# Altium PCB PCB_OSHW_BiDi_SDI_Fiber_Converter_V4_Reclocker_2024-11-17.pcbdoc
Units mm, origin at the board's own origin, x right, y up, seen from the top; angles counter-clockwise.
Board outline 127.84 x 68.58 mm, 2 copper layers (Top Layer, Bottom Layer); 119 components, 62 nets, 274 pads, 133 vias.
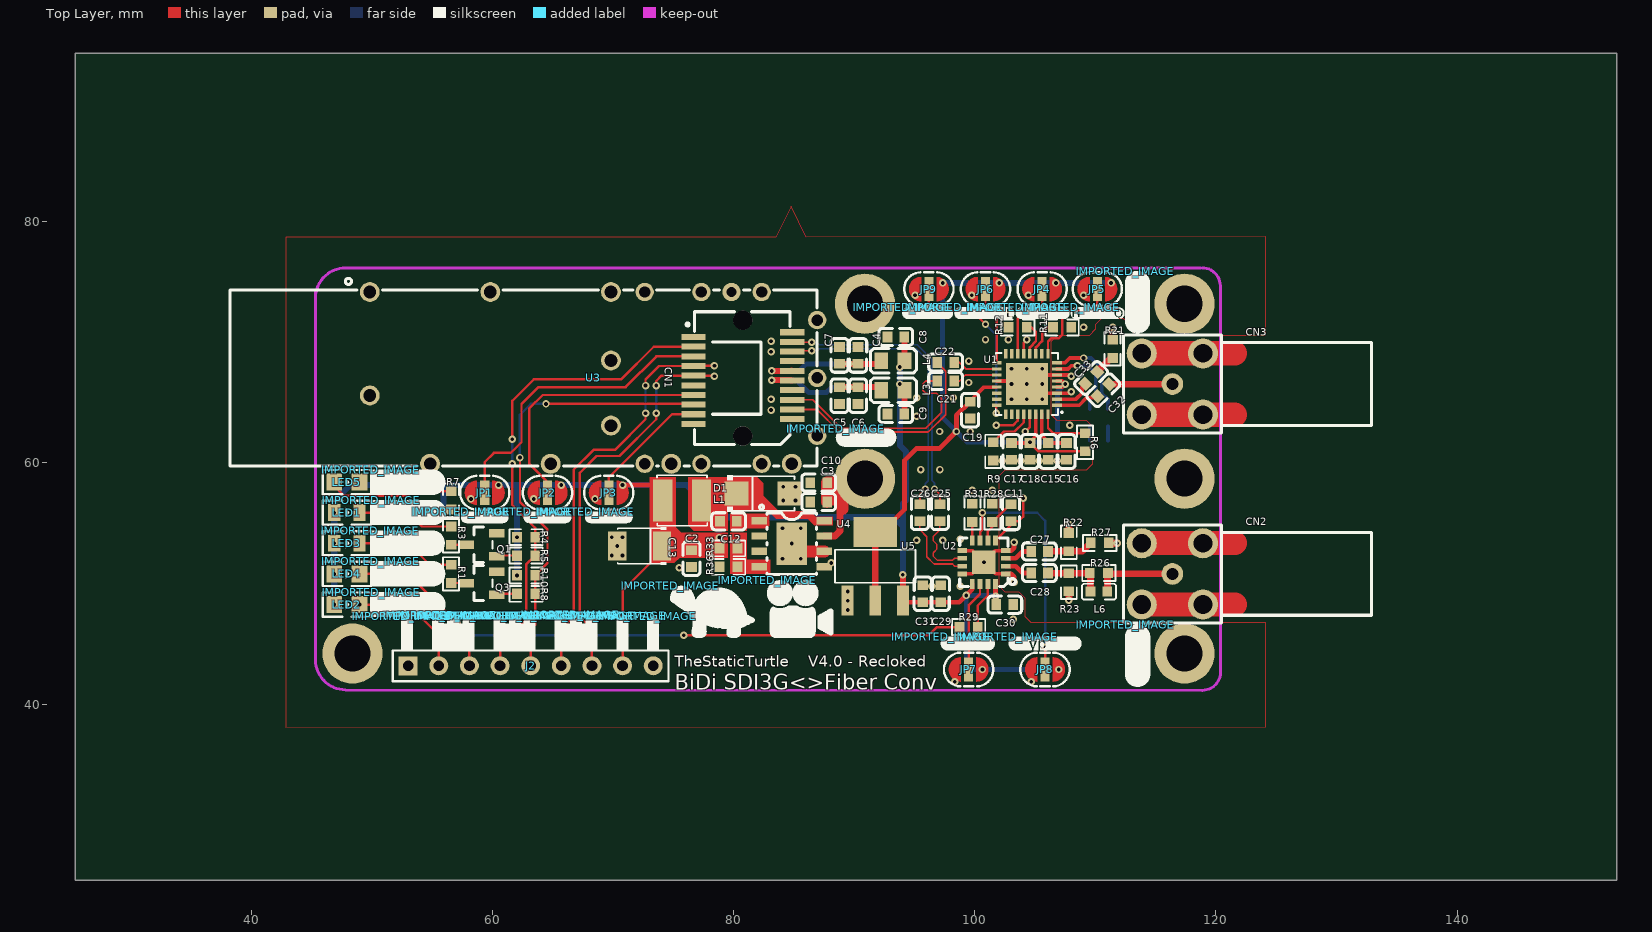
[diagram p0: Top Layer view]
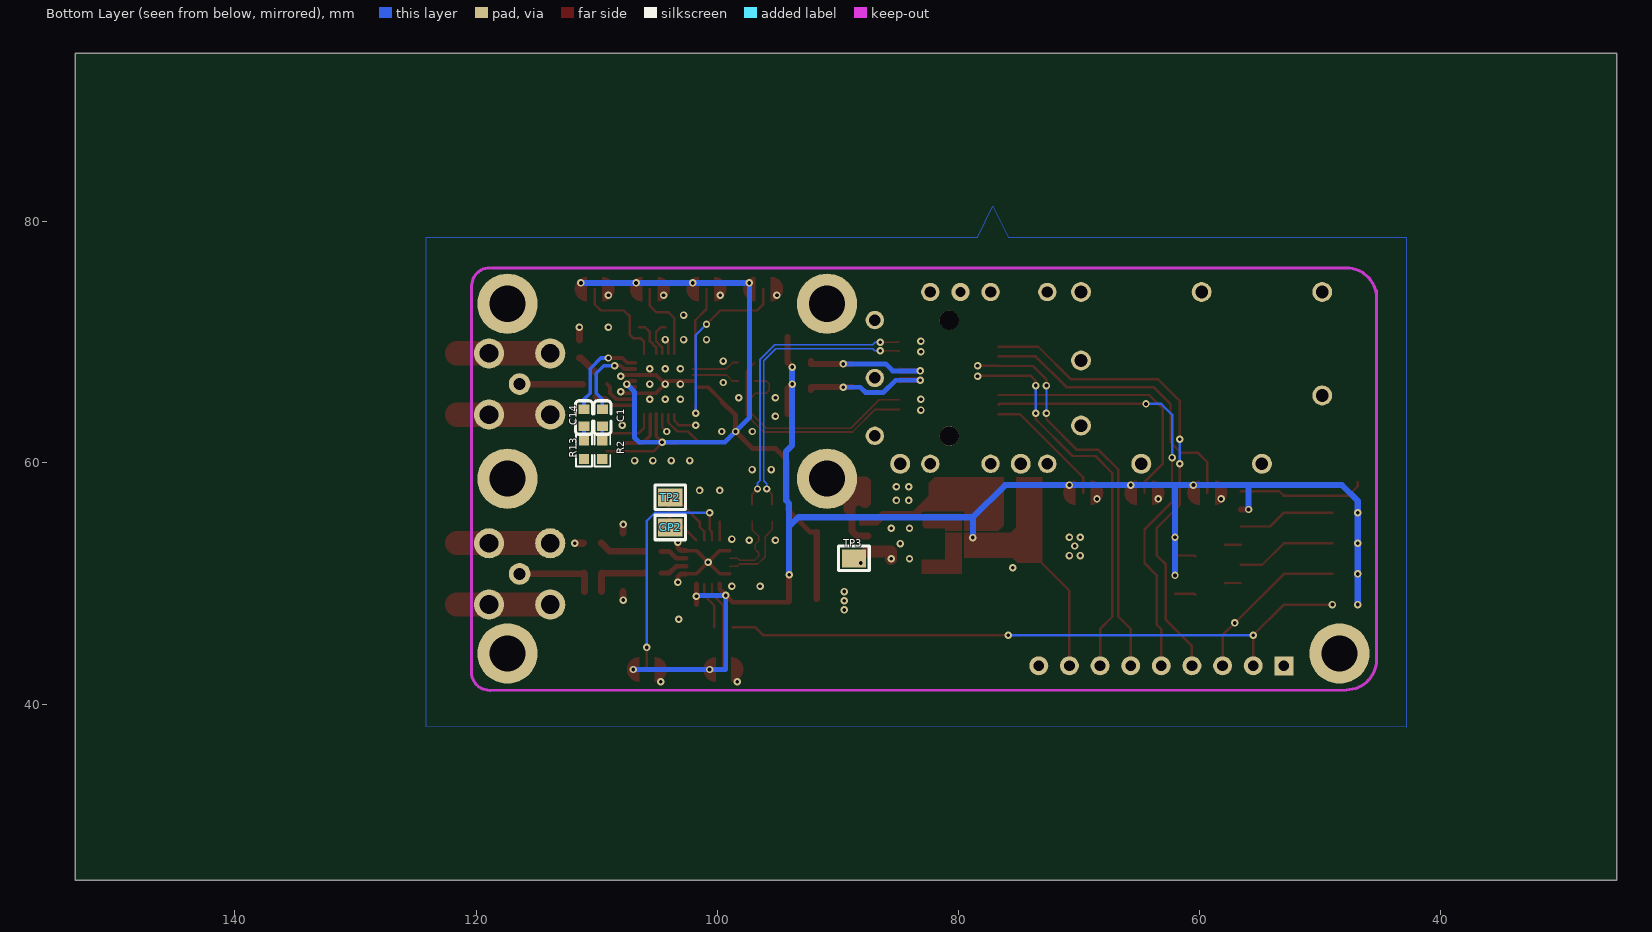
[diagram p1: Bottom Layer view, seen from below]

## Layer stack, top to bottom
Top Layer: signal copper (thickness not stored)
Dielectric: dielectric 0.32, FR-4, Dk 4.8
Bottom Layer: signal copper (thickness not stored)

## Board outline
153.239,25.4 25.4,25.4 25.4,93.98 153.239,93.98

## Components (designator, comment, footprint, x,y, rotation, side; value= is the part's Value field where it differs from the comment)
C1 "4.7uF" C0603#1 109.525,63.754 r90 bottom
C2 "100n" C0603#2 76.505,52.07 r90 top
C3 "100n" C0603#2 87.062,56.764 r0 top
C4 "10u" C0603#2 90.323,68.917 r270 top
C5 "100n" C0603#2 88.787,65.589 r90 top
C6 "10u" C0603#2 90.323,65.589 r90 top
C7 "100n" C0603#2 88.787,68.917 r270 top
C8 "100n" C0603#2 93.459,70.454 r0 top
C9 "10u" C0603#2 93.459,64.053 r0 top
C10 "10u" C0603#2 87.062,58.364 r0 top
C11 "DNF" C0603#2 103,55.868 r90 top
C12 "10n" C0603#2 79.573,55.163 r180 top
C13 "100uF" CASE-B_3528 72.212,53.115 r180 top
C14 "4.7uF" C0603#1 111.049,63.754 r90 bottom
C15 "1u" C0603#2 106.096,60.96 r90 top
C16 "100n" C0603#2 107.62,60.96 r90 top
C17 "100n" C0603#2 103.048,60.96 r90 top
C18 "1u" C0603#2 104.572,60.96 r90 top
C19 "100n" C0603#2 99.619,64.389 r90 top
C21 "4.7uF" C0603#2 97.587,66.802 r0 top
C22 "4.7uF" C0603#2 97.587,68.326 r0 top
C25 "4.7u" C0603#2 97.111,55.868 r270 top
C26 "4.7u" C0603#2 95.447,55.868 r270 top
C27 "1u" C0603#2 105.369,52.667 r0 top
C28 "1u" C0603#2 105.369,50.874 r0 top
C29 "10n" C0603#2 97.175,49.147 r270 top
C30 "10n" C0603#2 102.488,48.251 r180 top
C31 "10u" C0603#2 95.682,49.149 r270 top
C32 "4.7uF" C0603#2 110.668,66.04 r45 top
C33 "4.7uF" C0603#2 109.652,67.056 r45 top
CN1 "HC-SFP-20P" CONN-SMD_20P-P0.80_HCTL_HC-SFP-20P 80.761,67.042 r270 top
CN2 "SDI_IN" AMPHENOLRF_034-1030-12G 116.383,50.8 r0 top
CN3 "SDI_OUT" AMPHENOLRF_034-1030-12G 116.383,66.548 r0 top
D1 "SS34" SMA_L4.3-W2.6-LS5.2-RD 82.453,57.468 r0 top
GP2 "TEST-POINT-PTH-1X1" TESTPOINT-SMD_L1.6-W0.8_RCU-0C 103.896,54.651 r0 bottom
IMPORTED_IMAGE "IMPORTED_IMAGE" IMPORTED_IMAGE 49.913,59.436 r0 top
IMPORTED_IMAGE "IMPORTED_IMAGE" IMPORTED_IMAGE 49.958,56.928 r0 top
IMPORTED_IMAGE "IMPORTED_IMAGE" IMPORTED_IMAGE 49.866,54.388 r0 top
IMPORTED_IMAGE "IMPORTED_IMAGE" IMPORTED_IMAGE 49.906,51.848 r0 top
IMPORTED_IMAGE "IMPORTED_IMAGE" IMPORTED_IMAGE 49.93,49.292 r0 top
IMPORTED_IMAGE "IMPORTED_IMAGE" IMPORTED_IMAGE 103.397,72.898 r0 top
IMPORTED_IMAGE "IMPORTED_IMAGE" IMPORTED_IMAGE 107.969,72.898 r0 top
IMPORTED_IMAGE "IMPORTED_IMAGE" IMPORTED_IMAGE 98.317,72.898 r0 top
IMPORTED_IMAGE "IMPORTED_IMAGE" IMPORTED_IMAGE 93.999,72.898 r0 top
IMPORTED_IMAGE "IMPORTED_IMAGE" IMPORTED_IMAGE 57.391,55.976 r0 top
IMPORTED_IMAGE "IMPORTED_IMAGE" IMPORTED_IMAGE 62.598,55.976 r0 top
IMPORTED_IMAGE "IMPORTED_IMAGE" IMPORTED_IMAGE 67.678,55.976 r0 top
IMPORTED_IMAGE "IMPORTED_IMAGE" IMPORTED_IMAGE 112.465,75.914 r0 top
IMPORTED_IMAGE "IMPORTED_IMAGE" IMPORTED_IMAGE 112.473,46.595 r0 top
IMPORTED_IMAGE "IMPORTED_IMAGE" IMPORTED_IMAGE 102.818,45.593 r0 top
IMPORTED_IMAGE "IMPORTED_IMAGE" IMPORTED_IMAGE 97.188,45.593 r0 top
IMPORTED_IMAGE "IMPORTED_IMAGE" IMPORTED_IMAGE 52.435,47.308 r0 top
IMPORTED_IMAGE "IMPORTED_IMAGE" IMPORTED_IMAGE 54.995,47.348 r0 top
IMPORTED_IMAGE "IMPORTED_IMAGE" IMPORTED_IMAGE 56.247,47.372 r0 top
IMPORTED_IMAGE "IMPORTED_IMAGE" IMPORTED_IMAGE 57.556,47.348 r0 top
IMPORTED_IMAGE "IMPORTED_IMAGE" IMPORTED_IMAGE 61.396,47.348 r0 top
IMPORTED_IMAGE "IMPORTED_IMAGE" IMPORTED_IMAGE 62.612,47.334 r0 top
IMPORTED_IMAGE "IMPORTED_IMAGE" IMPORTED_IMAGE 60.116,47.342 r0 top
IMPORTED_IMAGE "IMPORTED_IMAGE" IMPORTED_IMAGE 65.173,47.348 r0 top
IMPORTED_IMAGE "IMPORTED_IMAGE" IMPORTED_IMAGE 66.453,47.398 r0 top
IMPORTED_IMAGE "IMPORTED_IMAGE" IMPORTED_IMAGE 67.733,47.348 r0 top
IMPORTED_IMAGE "IMPORTED_IMAGE" IMPORTED_IMAGE 70.293,47.348 r0 top
IMPORTED_IMAGE "IMPORTED_IMAGE" IMPORTED_IMAGE 72.854,47.308 r0 top
IMPORTED_IMAGE "IMPORTED_IMAGE" IMPORTED_IMAGE 74.732,49.807 r0 top
IMPORTED_IMAGE "IMPORTED_IMAGE" IMPORTED_IMAGE 82.772,50.269 r0 top
IMPORTED_IMAGE "IMPORTED_IMAGE" IMPORTED_IMAGE 88.49,62.842 r0 top
J2 "HDR-M-2.54_1x9" HDR-M-2.54_1X9 63.17,43.18 r0 top
JP1 "SOLDER BRIDGE 3P" "SOLDER BRIDGE 3P" 59.36,57.531 r270 top
JP2 "SOLDER BRIDGE 3P" "SOLDER BRIDGE 3P" 64.567,57.531 r270 top
JP3 "SOLDER BRIDGE 3P" "SOLDER BRIDGE 3P" 69.647,57.531 r270 top
JP4 "SOLDER BRIDGE 3P" "SOLDER BRIDGE 3P" 105.588,74.422 r270 top
JP5 "SOLDER BRIDGE 3P" "SOLDER BRIDGE 3P" 110.16,74.422 r270 top
JP6 "SOLDER BRIDGE 3P" "SOLDER BRIDGE 3P" 100.889,74.422 r270 top
JP7 "SOLDER BRIDGE 3P" "SOLDER BRIDGE 3P" 99.489,42.874 r270 top
JP8 "SOLDER BRIDGE 3P" "SOLDER BRIDGE 3P" 105.825,42.874 r270 top
JP9 "SOLDER BRIDGE 3P" "SOLDER BRIDGE 3P" 96.19,74.422 r270 top
L1 "10uH" IND-SMD_L4.0-W4.0 75.732,56.892 r180 top
L3 "100Ω" L0805 93.203,66.037 r180 top
L4 "100Ω" L0805 93.203,68.469 r180 top
L6 "2.7n" L0603 110.297,49.34 r180 top
LED1 "LED_SFP_FAULT" LED0805_RED 47.93,55.88 r0 top
LED2 "LED_CD" LED0805_GREEN 47.93,48.26 r0 top
LED3 "LED_SFP_LOS" LED0805_RED 47.93,53.34 r0 top
LED4 "LED_LOCK" LED0805_GREEN 47.93,50.8 r0 top
LED5 "LED_POWER" LED0805_BLUE 47.93,58.42 r0 top
Q1 "2N3904(SOT-23)" SOT-23-3_L2.9-W1.3-P1.90-LS2.4-TR 59.106,53.213 r0 top
Q3 "2N3904(SOT-23)" SOT-23-3_L2.9-W1.3-P1.90-LS2.4-TR 59.106,50.038 r0 top
R1 "300" R0603#1 56.566,50.8 r270 top
R2 "75" R0603#2 109.525,61.087 r90 bottom
R3 "300" R0603#1 56.566,53.975 r270 top
R4 "10k" R0603#1 62.789,53.848 r0 top
R5 "1k" R0603#1 62.789,52.324 r0 top
R6 "10k" R0603#1 109.144,61.722 r90 top
R7 "300" R0603#1 56.566,56.896 r270 top
R8 "1k" R0603#1 62.789,49.149 r0 top
R9 "1k" R0603#1 101.524,60.96 r270 top
R10 "10k" R0603#1 62.789,50.673 r0 top
R11 "1k" R0603#1 107.239,71.247 r180 top
R12 "1k" R0603#1 103.556,71.247 r0 top
R13 "75" R0603#2 111.049,61.087 r90 bottom
R21 "75" R0603#1 111.43,69.469 r90 top
R22 "75" R0603#1 107.8,53.434 r270 top
R23 "75" R0603#1 107.8,50.107 r90 top
R26 "75" R0603#1 110.297,50.874 r0 top
R27 "75" R0603#1 110.361,53.371 r0 top
R28 "1k" R0603#1 101.464,55.868 r270 top
R29 "DNF" R0603#1 99.488,46.393 r180 top
R31 "DNF" R0603#1 99.799,55.868 r90 top
R33 "10k" R0603#1 79.573,52.923 r0 top
R36 "5.6k" R0603#1 79.573,51.387 r180 top
TP2 "TEST-POINT-PTH-1X1" TESTPOINT-SMD_L1.6-W0.8_RCU-0C 103.896,57.148 r0 bottom
TP3 "TEST-POINT-PTH-1X1" TESTPOINT-SMD_L1.6-W0.8_RCU-0C 88.662,52.091 r0 bottom
U1 "LMH0397RTVR" QFN-32_L5.0-W5.0-P0.50-TL-EP3.5-1 104.318,66.548 r180 top
U2 "EQCO30R5" QFN16G-0.65-4X4MM 100.76,51.771 r180 top
U3 "HC-SFP-01L" TH_HC-SFP-01L 68.377,67.056 r0 top
U4 "TPS5430DDAR" ESOP-8_L4.9-W3.9-P1.27-LS6.0-TL-EP 84.822,53.307 r0 top
U5 "AMS1117-2.5(SOT-223)" SOT-223-4_L6.5-W3.5-P2.30-LS7.0-BR 91.745,51.435 r270 top
? "" ? 129.115,62.588 r0 top
? "" ? 129.132,54.809 r0 top

## Footprints (in the part's own frame and the unit in brackets; to place one, negate y for a bottom-side part, rotate by r counter-clockwise, add the part's x,y. Pads: shape width x height; smd on the part's side, far side on the other; paste and mask are expansions set on the pad)
AMPHENOLRF_034-1030-12G [mm]
  round 1.8 hole 1 paste+0 mask+0.051: 1(0,0)
  round 2.5 hole 1.55 paste+0 mask+0.051: GND(-2.54,-2.54) GND(-2.54,2.54) GND(2.54,-2.54) GND(2.54,2.54)
  silkscreen extent -4.06,-4.06 16.51,4.06
C0603#1 [mm]
  rect 0.8x0.9 smd paste+0 mask+0.051: 1(0.7,0) 2(-0.7,0)
  silkscreen extent -1.39,-0.72 1.41,0.71
C0603#2 [mm]
  rect 0.8x0.9 smd paste+0 mask+0.051: 1(-0.7,0) 2(0.7,0)
  silkscreen extent -1.41,-0.71 1.39,0.72
CASE-B_3528 [mm]
  rect 1.506x2.376 smd paste+0 mask+0.051: 1(-1.861,0) 2(1.861,0)
  silkscreen extent -2.21,-1.55 1.83,1.55
CONN-SMD_20P-P0.80_HCTL_HC-SFP-20P [mm]
  rect 0.5x2 smd paste+0 mask+0.051: 1(-3.4,-4.1) 2(-2.6,-4.1) 3(-1.8,-4.1) 4(-1,-4.1) 5(-0.2,-4.1) 6(0.6,-4.1) 7(1.4,-4.1) 8(2.2,-4.1) 9(3,-4.1) 10(3.8,-4.1) 11(3.4,4.1) 12(2.6,4.1) 13(1.8,4.1) 14(1,4.1) 15(0.2,4.1) 16(-0.6,4.1) 17(-1.4,4.1) 18(-2.2,4.1) 19(-3,4.1) 20(-3.8,4.1)
  round 1.6 hole 1.6 unplated paste+0: ""(-4.8,0) ""(4.8,0)
  silkscreen extent -5.5,-4.7 5.5,3.9
ESOP-8_L4.9-W3.9-P1.27-LS6.0-TL-EP [mm]
  rect 1.3x0.6 smd paste+0 mask+0.051: 1(-2.7,1.905) 2(-2.7,0.635) 3(-2.7,-0.635) 4(-2.7,-1.905) 5(2.7,-1.905) 6(2.7,-0.635) 7(2.7,0.635) 8(2.7,1.905)
  rect 2.5x3.5 smd paste+0 mask+0.051: 9(0,0)
  silkscreen extent -2.67,-2.55 2.05,3.2
HDR-M-2.54_1X9 [mil]
  rect 62x62 hole 35 paste+0 mask+2: 1(-400,0)
  round 62 hole 35 paste+0 mask+2: 2(-300,0) 3(-200,0) 4(-100,0) 5(0,0) 6(100,0) 7(200,0) 8(300,0) 9(400,0)
  silkscreen extent -450,-50 450,50
IMPORTED_IMAGE [mm]
  silkscreen extent 0,-2.06 6.16,0
IND-SMD_L4.0-W4.0 [mm]
  rect 1.6x3.5 smd paste+0 mask+0.051: 1(-1.6,0) 2(1.6,0)
  silkscreen extent -2.08,-2.1 2.08,2.1
L0603 [mm]
  rect 0.8x0.864 smd paste-100 mask+0.051: 1(-0.7,0) 2(0.7,0)
  silkscreen extent -1.42,-0.65 1.41,0.67
L0805 [mm]
  rect 1.133x1.377 smd paste-100 mask+0.051: 1(-0.966,0) 2(0.966,0)
  silkscreen extent -1.95,-1.02 1.86,1.02
LED0805_BLUE [mm]
  rect 1.3x1.4 smd paste+0 mask+0.051: 1(-1.05,0) 2(1.05,0)
  silkscreen extent -2,-1 2.3,1
LED0805_GREEN [mm]
  rect 1.3x1.4 smd paste+0 mask+0.051: 1(-1.05,0) 2(1.05,0)
  silkscreen extent -2,-1 2.3,1
LED0805_RED [mm]
  rect 1x1.4 smd paste+0 mask+0.051: 1(-1.05,0) 2(1.05,0)
  silkscreen extent -2,-1 2.3,1
QFN16G-0.65-4X4MM [mil]
  rect 31.5x15.7 smd paste+0 mask+2: 1(-71,38) 2(-71,13) 3(-71,-13) 4(-71,-38) 9(71,-38) 10(71,-13) 11(71,13) 12(71,38)
  rect 15.7x31.5 smd paste+0 mask+2: 5(-38,-71) 6(-13,-71) 7(13,-71) 8(38,-71) 13(38,71) 14(13,71) 15(-13,71) 16(-38,71)
  rect 76.8x76.8 smd paste+0 mask+2: 17(0,0)
  silkscreen extent -103,-79 79,79
QFN-32_L5.0-W5.0-P0.50-TL-EP3.5-1 [mm]
  rect 0.8x0.28 smd paste-100 mask+0.051: 1(-2.5,1.75) 2(-2.5,1.25) 3(-2.5,0.75) 4(-2.5,0.25) 5(-2.5,-0.25) 6(-2.5,-0.75) 7(-2.5,-1.25) 8(-2.5,-1.75) 17(2.5,-1.75) 18(2.5,-1.25) 19(2.5,-0.75) 20(2.5,-0.25) 21(2.5,0.25) 22(2.5,0.75) 23(2.5,1.25) 24(2.5,1.75)
  rect 0.28x0.8 smd paste-100 mask+0.051: 9(-1.75,-2.5) 10(-1.25,-2.5) 11(-0.75,-2.5) 12(-0.25,-2.5) 13(0.25,-2.5) 14(0.75,-2.5) 15(1.25,-2.5) 16(1.75,-2.5) 25(1.75,2.5) 26(1.25,2.5) 27(0.75,2.5) 28(0.25,2.5) 29(-0.25,2.5) 30(-0.75,2.5) 31(-1.25,2.5) 32(-1.75,2.5)
  rect 3.5x3.5 smd paste-100 mask+0.051: 33(0,0)
  silkscreen extent -2.99,-2.58 2.58,2.58
R0603#1 [mm]
  rect 0.806x0.864 smd paste-100 mask+0.051: 1(-0.753,0) 2(0.753,0)
  silkscreen extent -1.39,-0.66 1.39,0.66
R0603#2 [mm]
  rect 0.806x0.864 smd paste-100 mask+0.051: 1(0.753,0) 2(-0.753,0)
  silkscreen extent -1.39,-0.66 1.39,0.66
SMA_L4.3-W2.6-LS5.2-RD [mm]
  rect 2x2 smd paste+0 mask+0.051: 1(-2.2,0) 2(2.2,0)
  silkscreen extent -2.98,-1.5 2.6,1.5
"SOLDER BRIDGE 3P" [mm]
  rect 2x0.75 smd paste+0 mask+0.051: 2(0,0)
  Top Layer region: 1,-0.643 0.999,-0.689 0.996,-0.735 0.99,-0.781 0.983,-0.827 0.973,-0.872 0.962,-0.917 0.948,-0.961 0.932,-1.004 0.915,-1.047 0.895,-1.089 0.874,-1.13 0.85,-1.169 0.825,-1.208 0.798,-1.246 0.769,-1.282 0.739,-1.317 0.707,-1.35 0.674,-1.382 0.639,-1.412 0.603,-1.441 0.565,-1.468 0.526,-1.493 0.487,-1.517 0.446,-1.538 0.404,-1.558 0.361,-1.575 0.318,-1.591 0.274,-1.605 0.229,-1.616 0.184,-1.626 0.138,-1.633 0.092,-1.639 0.046,-1.642 0,-1.643 -0.046,-1.642 -0.092,-1.639 -0.138,-1.633 -0.184,-1.626 -0.229,-1.616 -0.274,-1.605 -0.318,-1.591 -0.361,-1.575 -0.404,-1.558 -0.446,-1.538 -0.487,-1.517 -0.526,-1.493 -0.565,-1.468 -0.603,-1.441 -0.639,-1.412 -0.674,-1.382 -0.707,-1.35 -0.739,-1.317 -0.769,-1.282 -0.798,-1.246 -0.825,-1.208 -0.85,-1.169 -0.874,-1.13 -0.895,-1.089 -0.915,-1.047 -0.932,-1.004 -0.948,-0.961 -0.962,-0.917 -0.973,-0.872 -0.983,-0.827 -0.99,-0.781 -0.996,-0.735 -0.999,-0.689 -1,-0.643
  Top Layer region: 1,0.643 0.999,0.689 0.996,0.735 0.99,0.781 0.983,0.827 0.973,0.872 0.962,0.917 0.948,0.961 0.932,1.004 0.915,1.047 0.895,1.089 0.874,1.13 0.85,1.169 0.825,1.208 0.798,1.246 0.769,1.282 0.739,1.317 0.707,1.35 0.674,1.382 0.639,1.412 0.603,1.441 0.565,1.468 0.526,1.493 0.487,1.517 0.446,1.538 0.404,1.558 0.361,1.575 0.318,1.591 0.274,1.605 0.229,1.616 0.184,1.626 0.138,1.633 0.092,1.639 0.046,1.642 0,1.643 -0.046,1.642 -0.092,1.639 -0.138,1.633 -0.184,1.626 -0.229,1.616 -0.274,1.605 -0.318,1.591 -0.361,1.575 -0.404,1.558 -0.446,1.538 -0.487,1.517 -0.526,1.493 -0.565,1.468 -0.603,1.441 -0.639,1.412 -0.674,1.382 -0.707,1.35 -0.739,1.317 -0.769,1.282 -0.798,1.246 -0.825,1.208 -0.85,1.169 -0.874,1.13 -0.895,1.089 -0.915,1.047 -0.932,1.004 -0.948,0.961 -0.962,0.917 -0.973,0.872 -0.983,0.827 -0.99,0.781 -0.996,0.735 -0.999,0.689 -1,0.643
  silkscreen extent -1.4,-2.04 1.4,2.04
SOT-23-3_L2.9-W1.3-P1.90-LS2.4-TR [mm]
  rect 1.25x0.7 smd paste+0 mask+0.051: 1(1.25,0.95) 2(1.25,-0.95) 3(-1.25,0)
  silkscreen extent -0.65,-1.46 0.9,1.46
SOT-223-4_L6.5-W3.5-P2.30-LS7.0-BR [mm]
  rect 2.47x0.98 smd paste+0 mask+0.051: 1(2.835,-2.3) 2(2.835,0) 3(2.835,2.3)
  rect 2.47x3.6 smd paste+0 mask+0.051: 4(-2.835,0)
  silkscreen extent -1.37,-3.33 1.37,3.33
TESTPOINT-SMD_L1.6-W0.8_RCU-0C [mm]
  rect 2x1.5 smd paste+0 mask+0.05: 1(0,0)
  silkscreen extent -1.27,-1.02 1.27,1.02
TH_HC-SFP-01L [mm]
  round 1.65 hole 1.05 paste+0 mask+0.05: 1(-18.55,7.125) 2(-8.55,7.125) 3(1.45,7.125) 11(16.45,-7.125) 14(6.45,-7.125) 16(-3.55,-7.125) 17(-13.55,-7.125) 18(-18.55,-1.455) 19(1.45,-3.955) 20(1.45,1.445)
  round 1.524 hole 0.95 paste+0 mask+0.05: 4(4.25,7.125) 5(8.95,7.125) 7(13.95,7.125) 8(18.55,4.795) 9(18.55,-0.005) 10(18.55,-4.805) 12(13.95,-7.125) 13(8.95,-7.125) 15(4.25,-7.125)
  round 1.524 hole 0.85 paste+0 mask+0.05: 6(11.45,7.125)
  Keep-Out Layer lines w0.254: -23.05,-7.239 -23.05,7.239
  silkscreen extent -30.15,-7.3 18.55,8.25
? [mm]

## Free pads (board coordinates)
  round 5 hole 3 paste+0 mask+0.051: 1(48.39,44.2) 1(90.89,73.2) 1(90.89,58.7) 1(117.39,44.2) 1(117.39,58.7) 1(117.39,73.2)

## Via types
v1: diameter 0.62, hole 0.31, Top Layer to Bottom Layer, tented both sides, 129 vias
v2: diameter 0.6, hole 0.3, Top Layer to Bottom Layer, tented both sides, 4 vias

## Nets (pads, with @x,y where several pads share a name; then routed paths per layer and width w, separated by ;. In a path a pad name is that pad's centre, name@x,y a point inside that pad or via, vN(x,y) a via of type N, cw(c..) or ccw(c..) an arc to the next point about the centre after c; other vN are vias at no path point)
+1.8V: C15.2 C16.2 U1.31 | length 4.1
  Top Layer w0.3: U1.31 105.568,62.25 106.157,61.661 C16.2
+2.5V: C17.2 C18.2 C19.2 R6.1 U1.4 U1.5 U1.21 U1.30 U5.2 U5.4 | length 74.4
  Top Layer w0.2: C18.2@104.572,61.671 105.272,60.96 R6.1@109.144,60.96
  Top Layer w0.3: C19.2 99.619,65.151 100.762,66.294 U1.21@101.778,66.294 ; C17.2@103.302,61.661 104.511,61.661 105.067,62.217 U1.30@105.067,64.059 ; U1.4 107.243,66.298 v1(107.493,66.548) 107.243,66.798 U1.5
  Top Layer w0.4: U5.4 92.294,54.27 94.158,56.134 94.158,60.198 95.174,61.214 97.079,61.214 v1(98.476,62.611) 98.476,63.947 C19.2
  Top Layer w0.5: U5.2@91.745,48.727 U5.4
  Bottom Layer w0.4: v1(97.333,74.93) 97.333,63.754 99.365,61.722 v1(104.572,61.722) 106.477,61.722 106.858,62.103 106.858,65.913 v1(107.493,66.548)
  Bottom Layer w0.5: v1(97.333,74.93) v1(111.303,74.93)
  other v1: 102.032,74.93 106.731,74.93
+3.3V: C2.2 C8.2 C9.2 C13.1 C29.2 C30.2 C31.2 J2.8 L1.2 L3.1 L4.1 LED1.1 LED2.1 LED3.1 LED4.1 R4.1 R7.2 R10.1 R33.1 U2.13 U2.16 U5.3 | length 144.8
  Top Layer w0.2: J2.8 70.79,49.403 74.072,52.685 C13.1@74.072,53.114
  Top Layer w0.4: v1(70.79,58.166) 73.457,58.166 74.133,57.49 L1.2 ; U5.3 94.045,48.448 C31.2 ; C31.2 98.718,48.449 v1(99.287,49.019) 99.794,49.526 U2.13 ; v1(101.72,48.955) 101.72,48.251 U2.16
  Top Layer w0.5: v1(55.931,56.143) R7.2 ; v1(93.779,66.549) 94.159,66.169 C9.2@94.159,64.053 ; v1(93.779,67.957) 94.163,68.341 C8.2@94.159,70.454 ; v1(94.031,50.736) 94.045,50.722 U5.3
  Bottom Layer w0.4: v1@99.286,49.019 99.286,42.873 v1@100.633,42.873 ; v1(99.287,49.019) 101.656,49.019 v1(101.72,48.955) ; v1@100.632,42.874 105.039,42.874 v1@106.968,42.874
  Bottom Layer w0.5: v1@46.879,55.88 46.879,56.86 48.184,58.166 55.931,58.166 ; v1(46.88,48.26) v1(46.88,50.8) v1(46.88,55.88) ; v1@62.035,53.848 62.035,58.166 v1(60.503,58.166) ; v1(62.036,50.673) v1(62.036,53.848) ; v1@78.791,53.812 78.791,55.499 76.124,58.166 v1(70.79,58.166) v1(60.503,58.166) ; v1(78.801,53.811) 78.801,55.499 93.269,55.499 94.031,54.737 v1(94.031,50.736) 94.031,56.642 94.285,56.896 94.285,60.96 93.779,61.466 v1(93.779,66.549) v1(93.779,67.957) ; 55.931,58.166 v1(55.931,56.143) 55.931,58.166 ; 55.931,58.166 v1(60.503,58.166)
  other v1: 100.632,42.874 106.968,42.874 46.88,53.34 65.71,58.166
+5V: C3.2 C10.2 pad.1@90.89,58.7 U4.7 | length 14.3
  Top Layer w0.6: U4.7 88.41,53.942 88.824,54.356 88.824,56.411 88.471,56.764 C3.2
  Top Layer w1: pad.1@88.858,58.7 pad.1@89.047,58.511 ; pad.1@89.047,58.511 89.047,56.188 89.047,57.658 88.341,58.364 C10.2 C3.2 89.047,58.049 pad.1@89.047,58.511
DRIVER_I2C_ADDR0: R11.2 U1.11 | length 3.1
  Top Layer w0.2: U1.11 105.067,69.583 105.588,70.104 105.588,70.866 105.969,71.247 R11.2@106.485,71.247
DRIVER_I2C_ADDR1: R9.1 U1.28 | length 3.9
  Top Layer w0.2: R9.1 102.421,62.611 103.302,62.611 104.069,63.378 U1.28
DRIVER_LOCK_N: J2.3 LED4.2 U1.27 | length 72.4
  Top Layer w0.2: LED4.2 53.01,50.8 v1(57.074,46.736) 58.09,45.72 J2.3 ; v1(101.778,63.119) 103.175,63.119 103.568,63.512 U1.27
  Mid-Layer 1 w0.2: v1(57.074,46.736) 59.106,46.736 60.63,48.26 60.63,56.261 63.17,58.801 86.411,58.801 89.459,61.849 100.508,61.849 v1(101.778,63.119)
DRIVER_MODE_SEL: R12.2 U1.12 | length 3
  Top Layer w0.2: R12.2 104.699,71.247 105.08,70.866 105.08,70.104 104.567,69.591 U1.12@104.567,69.047
GND: C2.1 C3.1 C4.1 C5.1 C6.1 C7.1 C8.1 C9.1 C10.1 C13.2 C15.1 C16.1 C17.1 C18.1 C19.1 C29.1 C30.1 C31.1 CN1.1 CN1.10 CN1.11 CN1.14 CN1.17 CN1.20 CN2.GND CN3.GND D1.2 GP2.1 J2.1 J2.9 LED5.2 pad.1@48.39,44.2 pad.1@90.89,73.2 pad.1@117.39,44.2 pad.1@117.39,58.7 pad.1@117.39,73.2 Q1.1 Q3.1 R2.2 R9.2 R11.1 R12.1 R13.2 R21.2 R22.1 R23.1 R27.2 R28.1 R31.2 R36.2 U1.3 U1.6 U1.20 U1.33 U2.1 U2.4 U2.9 U2.12 U2.17 U3.1 U3.2 U3.3 U3.4 U3.5 U3.6 U3.7 U3.8 U3.9 U3.10 U3.11 U3.12 U3.13 U3.14 U3.15 U3.16 U3.17 U3.18 U3.19 U3.20 U4.6 U4.9 U5.1 | length 58.8
  Top Layer w0.3: U2.12 99.794,50.806 v1(100.76,51.771) ; U2.9 99.794,52.736 v1(100.76,51.771) ; U1.20 104.318,66.798 v1(104.318,66.548) ; U2.1 101.725,50.806 v1(100.76,51.771) ; U2.4 101.725,52.736 v1(100.76,51.771) ; U1.3 107.887,65.799 v1(108.001,65.913) ; U1.6 107.887,67.297 v1(108.001,67.183) ; U1.3 105.068,65.798 v1(104.318,66.548) ; U1.6 105.068,67.298 v1(104.318,66.548)
  Top Layer w0.4: U2.1 103.004,50.8 103.256,50.549 v1(103.256,50.107) ; U2.4 103.005,52.736 103.256,52.987 v1(103.256,53.435)
  Top Layer w0.59: v1(107.8,48.635) R23.1@107.8,49.353 ; R22.1 v1(107.8,54.907) ; R27.2 111.145,53.34 v1(111.811,53.34) ; R21.2 v1(111.43,71.247)
  Top Layer w1: v1(85.578,52.047) 85.578,52.672 U4.6
  Top Layer w2: CN3.GND@113.817,63.997 121.562,63.997 ; CN2.GND@113.838,48.271 121.583,48.271 ; CN2.GND@113.838,53.351 121.583,53.351 ; CN3.GND@113.838,69.097 121.583,69.097
  other v1: 98.336,41.85 104.673,41.85 103.192,47.034 89.459,47.816 89.459,48.578 89.459,49.34 96.444,49.784 98.775,49.787 75.489,51.308 84.054,52.047 69.901,52.324 70.79,52.324 70.351,53.115 84.816,53.317 95.174,53.594 97.333,53.594 98.775,53.691 69.901,53.848 70.79,53.848 84.054,54.587 85.578,54.587 84.125,56.896 85.141,56.896 58.217,57.023 63.424,57.023 68.504,57.023 99.799,57.724 101.464,57.724 84.125,58.039 85.141,58.039 95.511,59.452 97.111,59.452 102.286,60.198 103.81,60.198 105.334,60.198 106.858,60.198 97.079,62.611 99.619,62.611 107.874,63.119 95.174,63.881 83.109,64.389 83.109,65.278 103.048,65.278 104.318,65.278 105.588,65.278 95.174,65.405 98.222,65.405 103.048,66.548 105.588,66.548 99.492,66.675 103.048,67.818 104.318,67.818 105.588,67.818 99.492,68.453 83.109,69.215 83.109,70.104 100.889,70.231 102.794,70.231 109.017,71.247 102.794,72.263 95.047,73.914 99.746,73.914 104.445,73.914 109.017,73.914
I2C_SCK: CN1.5 J2.7 U1.29 | length 66.4
  Top Layer w0.2: J2.7 68.25,46.228 67.234,47.244 67.234,59.182 68.631,60.579 70.536,60.579 73.584,63.627 v1(73.584,64.135) ; v1(73.584,66.421) 73.584,66.802 74.024,67.241 CN1.5@76.66,67.241 ; CN1.5 78.351,67.242 v1(78.41,67.183) ; v1(104.191,62.611) 104.568,62.988 U1.29
  Mid-Layer 1 w0.2: v1(78.41,67.183) 79.172,67.183 80.188,68.199 87.554,68.199 89.078,69.723 99.619,69.723 100.381,68.961 101.524,68.961 102.286,68.199 102.286,64.516 v1(104.191,62.611)
  Bottom Layer w0.2: v1(73.584,64.135) v1(73.584,66.421)
I2C_SDA: CN1.4 J2.6 U1.13 | length 62.6
  Top Layer w0.2: J2.6 65.71,46.228 66.726,47.244 66.726,59.436 68.377,61.087 70.155,61.087 72.695,63.627 v1(72.695,64.135) ; v1(72.695,66.421) 72.695,66.929 73.808,68.042 CN1.4@76.66,68.042 ; CN1.4 76.691,68.072 v1(78.41,68.072) ; U1.13 104.069,69.982 v1(104.318,70.231)
  Mid-Layer 1 w0.2: v1(78.41,68.072) 79.172,68.072 79.68,68.58 87.3,68.58 88.824,70.104 99.873,70.104 100.635,69.342 103.429,69.342 v1(104.318,70.231)
  Bottom Layer w0.2: v1(72.695,64.135) v1(72.695,66.421)
LED1_2: LED1.2 R3.1 | length 8.1
  Top Layer w0.2: LED1.2 53.01,55.88 54.161,54.729 R3.1
LED5_1: LED5.1 R7.1 | length 10.5
  Top Layer w0.2: LED5.1@46.879,58.42 46.879,58.075 47.676,57.277 53.01,57.277 53.384,57.65 R7.1
PWR_BOOT: C12.1 U4.1
PWR_PH: C12.2 D1.1 L1.1 U4.8
Q1_3: Q1.3 R3.2 | length 1.3
  Top Layer w0.2: R3.2 56.575,53.213 Q1.3
Q3_2: Q3.2 R8.1 | length 1.7
  Top Layer w0.2: Q3.2 60.417,49.149 R8.1
Q3_3: Q3.3 R1.2 | length 1.3
  Top Layer w0.2: R1.2 Q3.3
R1_1: LED3.2 R1.1 | length 8.3
  Top Layer w0.2: LED3.2 53.01,53.34 54.796,51.554 R1.1
R5_1: Q1.2 R5.1 | length 1.7
  Top Layer w0.2: Q1.2 60.417,52.324 R5.1
R36_1: R33.2 R36.1 U4.4
SDI_IN: CN2.1 L6.1 R26.2 | length 6.9
  Top Layer w0.56: L6.1@110.997,49.339 110.997,50.821 111.05,50.875 111.114,50.811 CN2.1@116.378,50.811
SDI_IN_BYPASS: JP8.2 U2.7 | length 20.2
  Top Layer w0.2: U2.7 100.44,54.267 100.632,54.46 v1(100.632,55.868) ; JP8.2@105.826,42.874 105.842,42.891 v1(105.842,44.704)
  Bottom Layer w0.2: v1(100.632,55.868) 105.176,55.868 105.842,55.202 v1(105.842,44.704)
SDI_IN_CABLE_DETECT: J2.2 LED2.2 R29.2 | length 53.6
  Top Layer w0.2: v1(48.98,48.26) 53.01,48.26 v1(55.55,45.72) J2.2 ; v1(75.87,45.72) 96.19,45.72 96.863,46.393 R29.2
  Bottom Layer w0.2: v1(55.55,45.72) v1(75.87,45.72)
SDI_IN_MUTE: JP7.2 U2.14 | length 7.5
  Top Layer w0.2: JP7.2@99.488,42.873 99.488,48.195 100.429,49.137 U2.14
SDI_IN_N: C27.2 R22.2 R27.1 | length 3.8
  Top Layer w0.56: C27.2 R22.2 108.918,52.682 R27.1
SDI_IN_P: C28.2 L6.2 R23.2 R26.1 | length 5
  Top Layer w0.56: C28.2 R23.2 R26.1
  Top Layer w0.59: R26.1 109.597,50.821 L6.2@109.597,49.339
SDI_INA_N: C27.1 U2.3 | length 2.3
  Top Layer w0.4: U2.3 103.394,52.101 103.96,52.667 C27.1
SDI_INA_P: C28.1 U2.2 | length 2.3
  Top Layer w0.4: U2.2 103.394,51.441 103.961,50.874 C28.1
SDI_OUT2_N: C1.2 R2.1 | length 1.2
  Bottom Layer w0.3: R2.1 C1.2
SDI_OUT2_P: C14.2 R13.1 | length 1.2
  Bottom Layer w0.3: R13.1 C14.2
SDI_OUT_EN: R6.2 U1.32 | length 4.4
  Top Layer w0.2: U1.32 106.068,62.893 106.485,62.476 R6.2
SDI_OUT_HOST_EQ0: JP5.2 U1.9 | length 8.6
  Top Layer w0.2: U1.9 106.068,70.076 106.35,70.358 106.985,70.358 107.239,70.612 107.239,72.136 107.747,72.644 109.652,72.644 110.16,73.152 JP5.2
SDI_OUT_N: C33.2 R21.1 | length 1.8
  Top Layer w0.56: C33.2 111.312,68.716 R21.1
SDI_OUT_OUT_CTRL: JP6.2 U1.17 | length 6.5
  Top Layer w0.2: JP6.2 100.889,72.771 101.819,71.841 U1.17
SDI_OUT_OUTSEL: JP4.2 U1.14 | length 6.8
  Top Layer w0.2: U1.14 103.569,72.022 104.064,72.517 105.08,72.517 105.588,73.025 JP4.2
SDI_OUT_P: C32.2 CN3.1 | length 5.2
  Top Layer w0.56: C32.2 116.37,66.535 CN3.1
SDI_OUT_SDI_VDO: JP9.2 U1.24 | length 15.1
  Top Layer w0.2: JP9.2 96.19,73.152 96.698,72.644 99.746,72.644 v1(100.889,71.501) ; v1(101.778,64.135) 101.778,64.798 U1.24
  Bottom Layer w0.2: v1(100.889,71.501) 101.778,70.612 v1(101.778,64.135)
SDI_OUTA2_N: C1.1 U1.7 | length 6.8
  Top Layer w0.3: U1.7 107.727,67.798 108.001,68.072 v1(108.509,68.072)
  Bottom Layer w0.3: v1(108.509,68.072) 109.398,68.072 110.033,67.437 110.033,65.786 109.525,65.278 C1.1
SDI_OUTA2_P: C14.1 U1.8 | length 7.8
  Top Layer w0.3: U1.8 107.465,68.298 107.874,68.707 v1(109.017,68.707)
  Bottom Layer w0.3: v1(109.017,68.707) 109.652,68.707 110.541,67.818 110.541,65.786 111.049,65.278 C14.1
SDI_OUTA_N: C33.1 U1.2 | length 3.2
  Top Layer w0.3: U1.2 108.402,65.298 108.89,65.786 108.89,66.294 C33.1
SDI_OUTA_P: C32.1 U1.1 | length 3.7
  Top Layer w0.3: U1.1 108.664,64.798 109.271,65.405 110.173,65.405 C32.1
SFP_IN_N: C25.2 U2.10 | length 6
  Top Layer w0.126: C25.2@97.112,55.166 97.112,54.458 96.536,53.881 96.536,53.564 96.856,53.243 96.856,52.86 96.599,52.603 96.536,52.537 96.536,52.283 96.873,51.943 98.181,51.943 98.339,52.1 U2.10
SFP_IN_P: C26.2 U2.11 | length 6.4
  Top Layer w0.126: C26.2@95.446,55.166 95.446,54.46 96.022,53.884 96.022,52.22 96.619,51.623 98.154,51.623 98.336,51.44 U2.11
SFP_OUT_N: C22.2 U1.18 | length 4
  Top Layer w0.15: C22.2 98.73,68.326 99.258,67.798 U1.18@102.073,67.798
SFP_OUT_P: C21.2 U1.19 | length 4
  Top Layer w0.15: C21.2 98.73,66.802 99.225,67.297 U1.19@102.073,67.297
SFP_RATE_SELECT0: CN1.7 JP2.2 | length 21.7
  Top Layer w0.2: JP2.2 64.567,58.42 63.043,59.944 63.043,64.516 64.168,65.641 CN1.7@76.66,65.641
SFP_RATE_SELECT1: CN1.9 JP3.2 | length 10.5
  Top Layer w0.2: JP3.2 69.647,58.801 74.887,64.041 CN1.9@76.66,64.041
SFP_RD+: C21.1 CN1.13 | length 18.7
  Top Layer w0.15: CN1.13 86.574,65.242 88.928,62.888 95.949,62.888 97.229,64.168 97.229,65.382 96.825,65.786 95.936,65.786 95.682,66.04 95.682,66.548 95.936,66.802 C21.1@96.886,66.802
SFP_RD-: C22.1 CN1.12 | length 18.7
  Top Layer w0.15: CN1.12 86.909,64.442 88.783,62.568 96.147,62.568 97.587,64.008 97.587,67.625 C22.1@96.886,68.326
SFP_RX_LOS: CN1.8 J2.5 R8.2 R10.2 | length 37.1
  Top Layer w0.2: v1(62.281,60.452) 62.281,56.769 64.567,54.483 64.567,51.698 R10.2 R8.2 ; J2.5 63.17,46.228 63.544,46.601 R8.2 ; v1(64.44,64.897) 76.606,64.897 CN1.8
  Bottom Layer w0.2: v1@62.279,60.452 62.279,64.005 63.17,64.897 v1(64.44,64.897)
SFP_TD+: C26.1 CN1.18 | length 23.9
  Top Layer w0.15: CN1.18@84.927,69.246 84.991,69.309 v2(86.486,69.309) ; C26.1 95.447,57.404 v2(95.895,57.852)
  Bottom Layer w0.15: v2(86.486,69.309) 86.934,69.309 87.105,69.479 95.151,69.479 96.142,68.489 96.142,58.537 95.895,58.29 v2(95.895,57.852)
SFP_TD-: C25.1 CN1.19 | length 24.4
  Top Layer w0.15: CN1.19@84.949,70.076 85.012,70.013 v2(86.486,70.013) ; v2@96.664,57.851 97.111,57.404 C25.1
  Bottom Layer w0.15: v2(86.486,70.013) 86.906,70.013 87.117,69.799 95.212,69.799 96.462,68.55 96.462,58.537 96.665,58.334 v2@96.665,57.851
  other v2: 96.663,57.852
SFP_TX_DISABLE: CN1.3 JP1.2 | length 25.3
  Top Layer w0.2: JP1.2 59.36,60.071 60.122,60.833 61.519,60.833 62.408,61.722 62.408,64.897 63.805,66.294 71.044,66.294 73.592,68.842 CN1.3@76.66,68.842
SFP_TX_FAULT: CN1.2 J2.4 R4.2 R5.2 | length 40.8
  Top Layer w0.2: J2.4 60.63,44.831 62.789,46.99 62.789,51.57 R5.2 ; v1(61.646,59.944) 61.646,56.515 63.544,54.618 R4.2 ; v1(61.646,61.976) 61.646,65.151 63.424,66.929 70.663,66.929 73.376,69.642 CN1.2@76.66,69.642 ; R5.2 R4.2
  Bottom Layer w0.2: v1(61.646,59.944) v1(61.646,61.976)
TP3_1: TP3.1 U4.5
  other v1: 88.086,51.707
U2_5: C11.1 TP2.1 U2.5 | length 4.8
  Top Layer w0.2: U2.5 103,54.85 C11.1 ; C11.1@102.999,55.166 103.645,55.166 104.023,55.547 v1(104.024,57.084)
U2_6: C11.2 R28.2 U2.6 | length 3.8
  Top Layer w0.2: U2.6 101.08,54.331 101.463,54.714 101.463,55.113 102.916,56.569 C11.2
U2_8: R31.1 U2.8 | length 1.5
  Top Layer w0.2: U2.8 R31.1
U2_15: R29.1 U2.15 | length 3.9
  Top Layer w0.2: R29.1@100.242,46.393 100.242,48.18 101.09,49.03 U2.15
VCC_SFPR: C5.2 C6.2 CN1.15 L3.2 | length 12.4
  Top Layer w0.5: v1(83.154,66.869) 84.783,66.869 CN1.15@84.796,66.856 ; C5.2 C6.2 92.238,66.289 L3.2
  Bottom Layer w0.4: v1(83.154,66.869) 85.202,66.868 86.226,65.844 87.699,65.844 88.138,66.284 v1(89.555,66.285)
VCC_SFPT: C4.2 C7.2 CN1.16 L4.2 | length 12
  Top Layer w0.5: v1(83.154,67.637) 84.777,67.637 CN1.16@84.796,67.656 ; C7.2 C4.2 92.238,68.217 L4.2
  Bottom Layer w0.4: v1(83.154,67.637) 85.458,67.637 86.034,68.213 v1(89.555,68.213)
pads on no net: CN1. CN1.6 U1.10 U1.15 U1.16 U1.22 U1.23 U1.25 U1.26 U4.2 U4.3
copper on no net: | length 0

## Polygon pours and split planes (outlines as drawn)
GND on Bottom Layer (solid): 42.85,78.74 42.85,38.1 124.123,38.137 124.13,78.74 78.41,78.74 77.14,81.28 75.87,78.74
GND on Mid-Layer 2 (solid): 42.85,78.74 42.85,38.1 124.123,38.137 124.13,78.74 80.95,78.74 79.68,81.28 78.41,78.74
GND on Mid-Layer 1 (solid): 42.85,78.74 42.85,38.1 124.123,38.137 124.13,46.736 104.699,46.736 104.191,47.244 104.191,48.768 103.683,49.276 102.54,49.276 102.032,49.784 102.032,58.928 102.54,59.436 109.271,59.436 109.779,59.944 109.779,62.992 109.271,63.5 106.858,63.5 106.35,64.008 106.35,70.104 106.858,70.612 109.525,70.612 110.033,71.12 110.033,71.501 110.541,72.009 112.319,72.009 112.827,71.501 112.827,71.12 113.335,70.612 124.13,70.612 124.123,78.782 83.541,78.782 82.261,81.279 81.045,78.782
GND on Top Layer (solid): 42.85,78.74 42.85,38.1 124.123,38.137 124.13,46.736 104.699,46.736 104.191,47.244 104.191,48.768 103.683,49.276 102.54,49.276 102.032,49.784 102.032,58.928 102.54,59.436 109.271,59.436 109.779,59.944 109.779,62.992 109.271,63.5 106.858,63.5 106.35,64.008 106.35,70.104 106.858,70.612 109.525,70.612 110.033,71.12 110.033,71.501 110.541,72.009 112.319,72.009 112.827,71.501 112.827,71.12 113.335,70.612 124.13,70.612 124.123,78.782 86.03,78.74 84.76,81.28 83.49,78.74

## Keep-outs
Keep-Out Layer:
  lines w0.254: 45.328,43.686 ccw(c47.828,43.686) 47.828,41.186 ; 45.328,73.686 cw(c47.828,73.686) 47.828,76.186 ; 118.861,76.186 cw(c118.861,74.686) 120.361,74.686 ; 118.873,41.146 ccw(c118.873,42.646) 120.373,42.646

## Other copper
Top Layer:
  region net PWR_BOOT: 79.701,54.395 79.701,55.804 82.773,55.804 82.965,55.612 82.965,54.779 82.773,54.587 81.109,54.587 81.109,54.395
  region net R36_1: 79.701,54.203 79.701,50.811 83.029,50.811 83.029,51.963 81.109,51.963 81.109,54.203
  region net PWR_PH: 76.245,58.812 76.245,54.843 76.693,54.395 79.509,54.395 79.509,55.996 82.901,55.996 83.541,55.355 86.166,55.355 86.678,54.843 88.214,54.843 88.214,55.548 86.806,55.548 86.358,55.996 83.733,55.996 82.453,57.276 82.453,58.3 81.941,58.812
  region net +3.3V: 73.044,58.812 73.044,51.707 75.092,51.707 75.54,52.155 79.509,52.155 79.509,54.203 75.668,54.203 75.22,54.651 75.22,58.812

## Silkscreen, mask and mechanical layers (free items; w line width, h text height)
Top Overlay:
  region: 55.868,44.429 55.868,46.679 56.316,46.679 56.316,44.429
  region: 57.165,44.429 57.165,46.679 57.613,46.679 57.613,44.429
  region: 61.004,44.429 61.004,46.679 61.452,46.679 61.452,44.429
  region: 62.284,44.429 62.284,46.679 62.732,46.679 62.732,44.429
  region: 66.069,44.429 66.069,46.679 66.517,46.679 66.517,44.429
  region: 67.345,44.429 67.345,46.679 67.793,46.679 67.793,44.429
  text "TheStaticTurtle" at 75.114,43.102 h0.9
  text "V4.0 - Recloked" at 86.185,43.096 h0.9
  text "BiDi SDI3G<>Fiber Conv" at 75.114,41.184 h1.28
Top Solder:
  lines w2 net GND: 113.817,63.997 121.562,63.997 ; 113.838,53.351 121.583,53.351 ; 113.838,69.097 121.583,69.097 ; 113.838,48.271 121.583,48.271 113.838,48.271